# Altium PCB 车架.pcbdoc
Units mil, origin at the board's own origin, x right, y up, seen from the top; angles counter-clockwise.
Board outline 4935 x 4920 mil, 2 copper layers (Top Layer, Bottom Layer); 2 components, 2 nets, 21 pads, 0 vias.
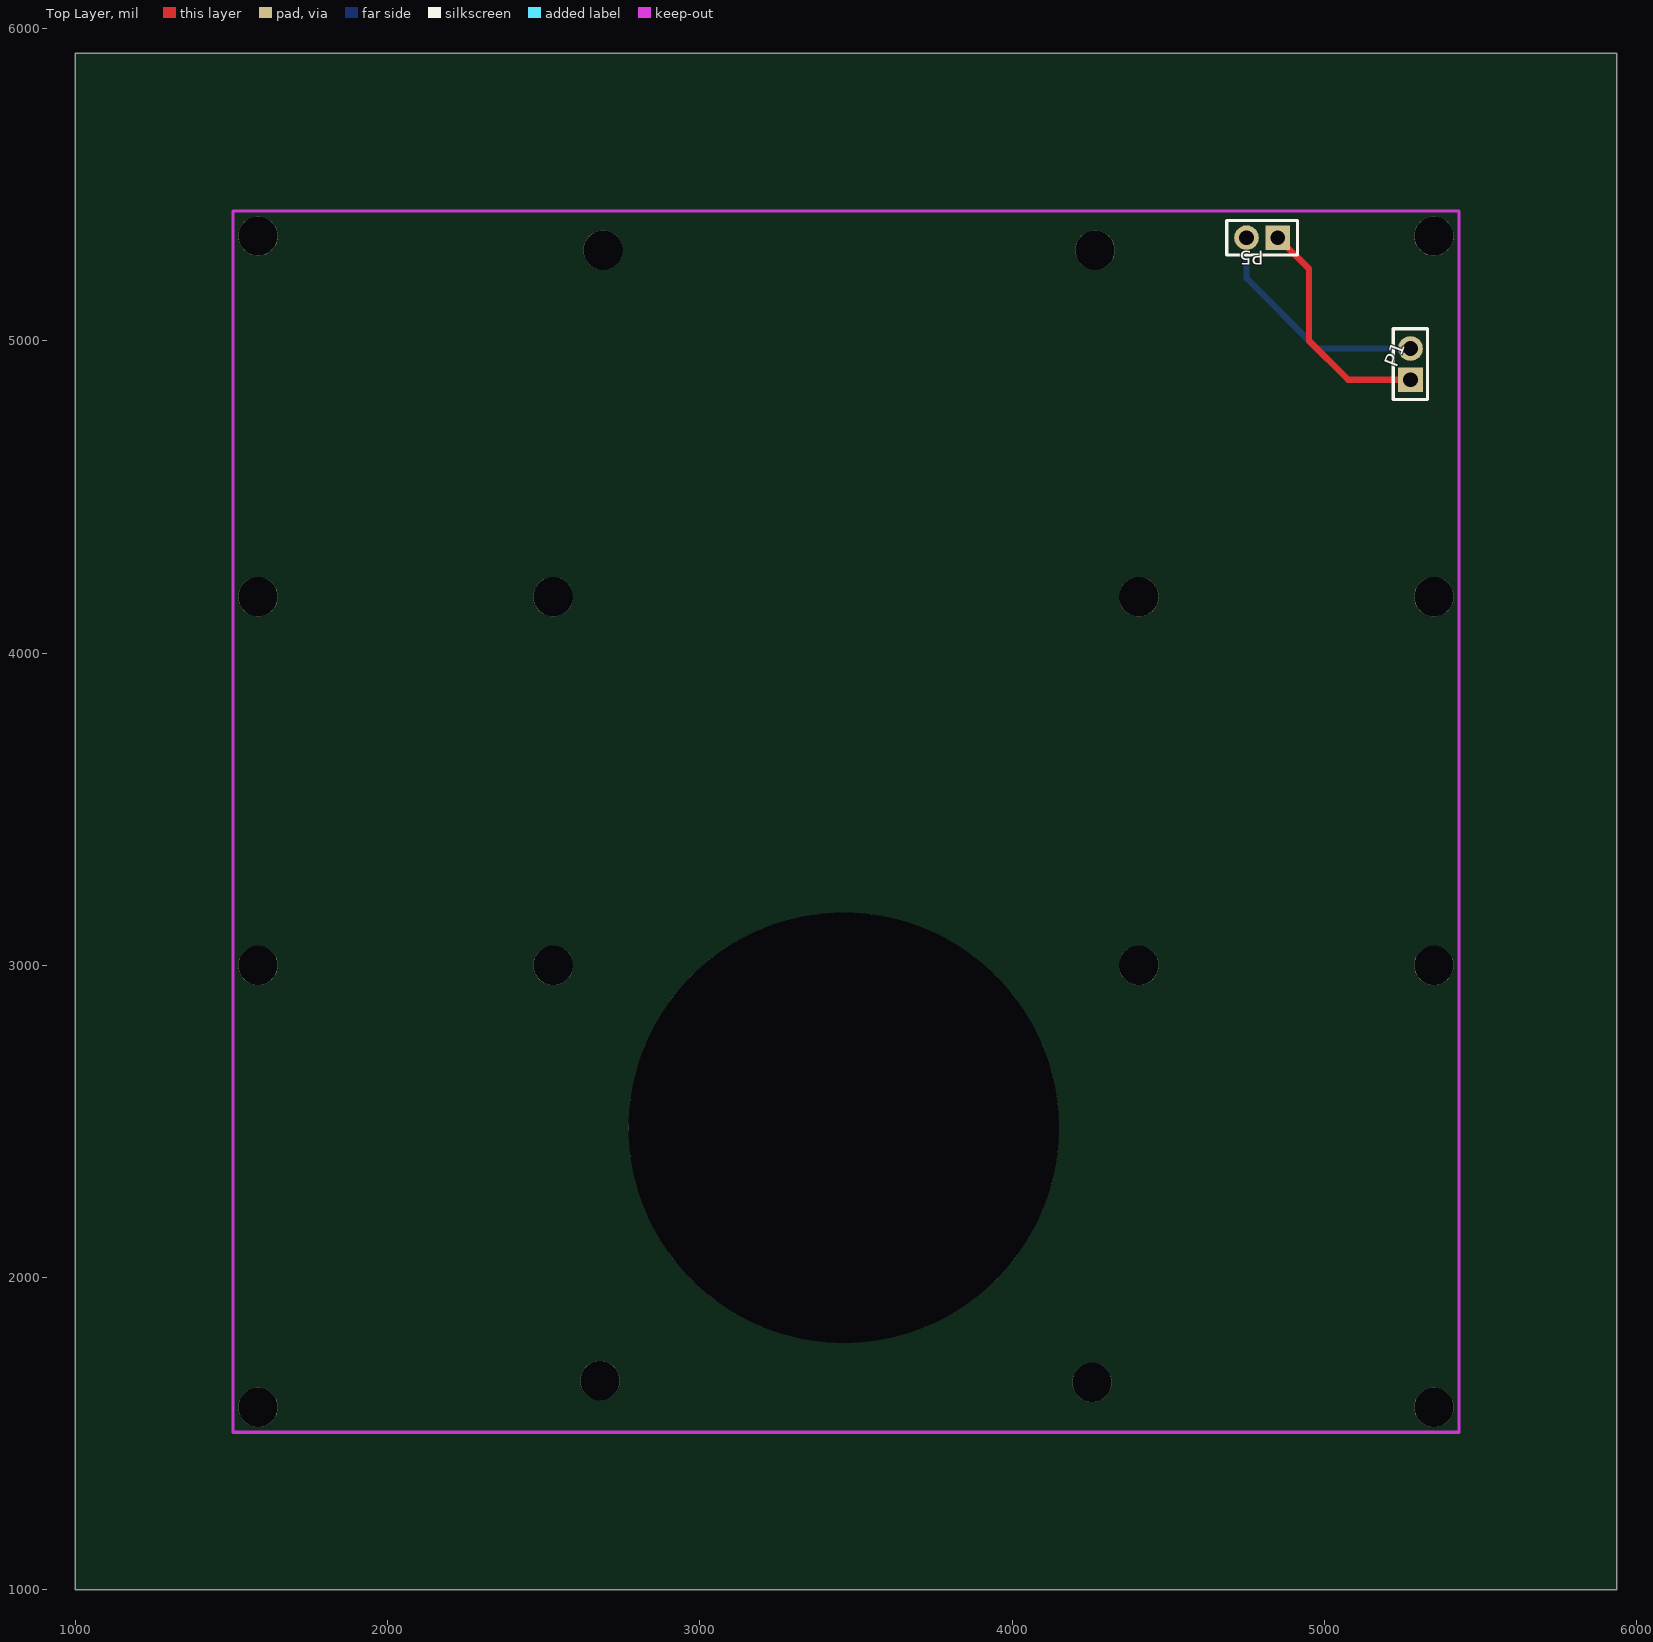
[diagram p0: Top Layer view]
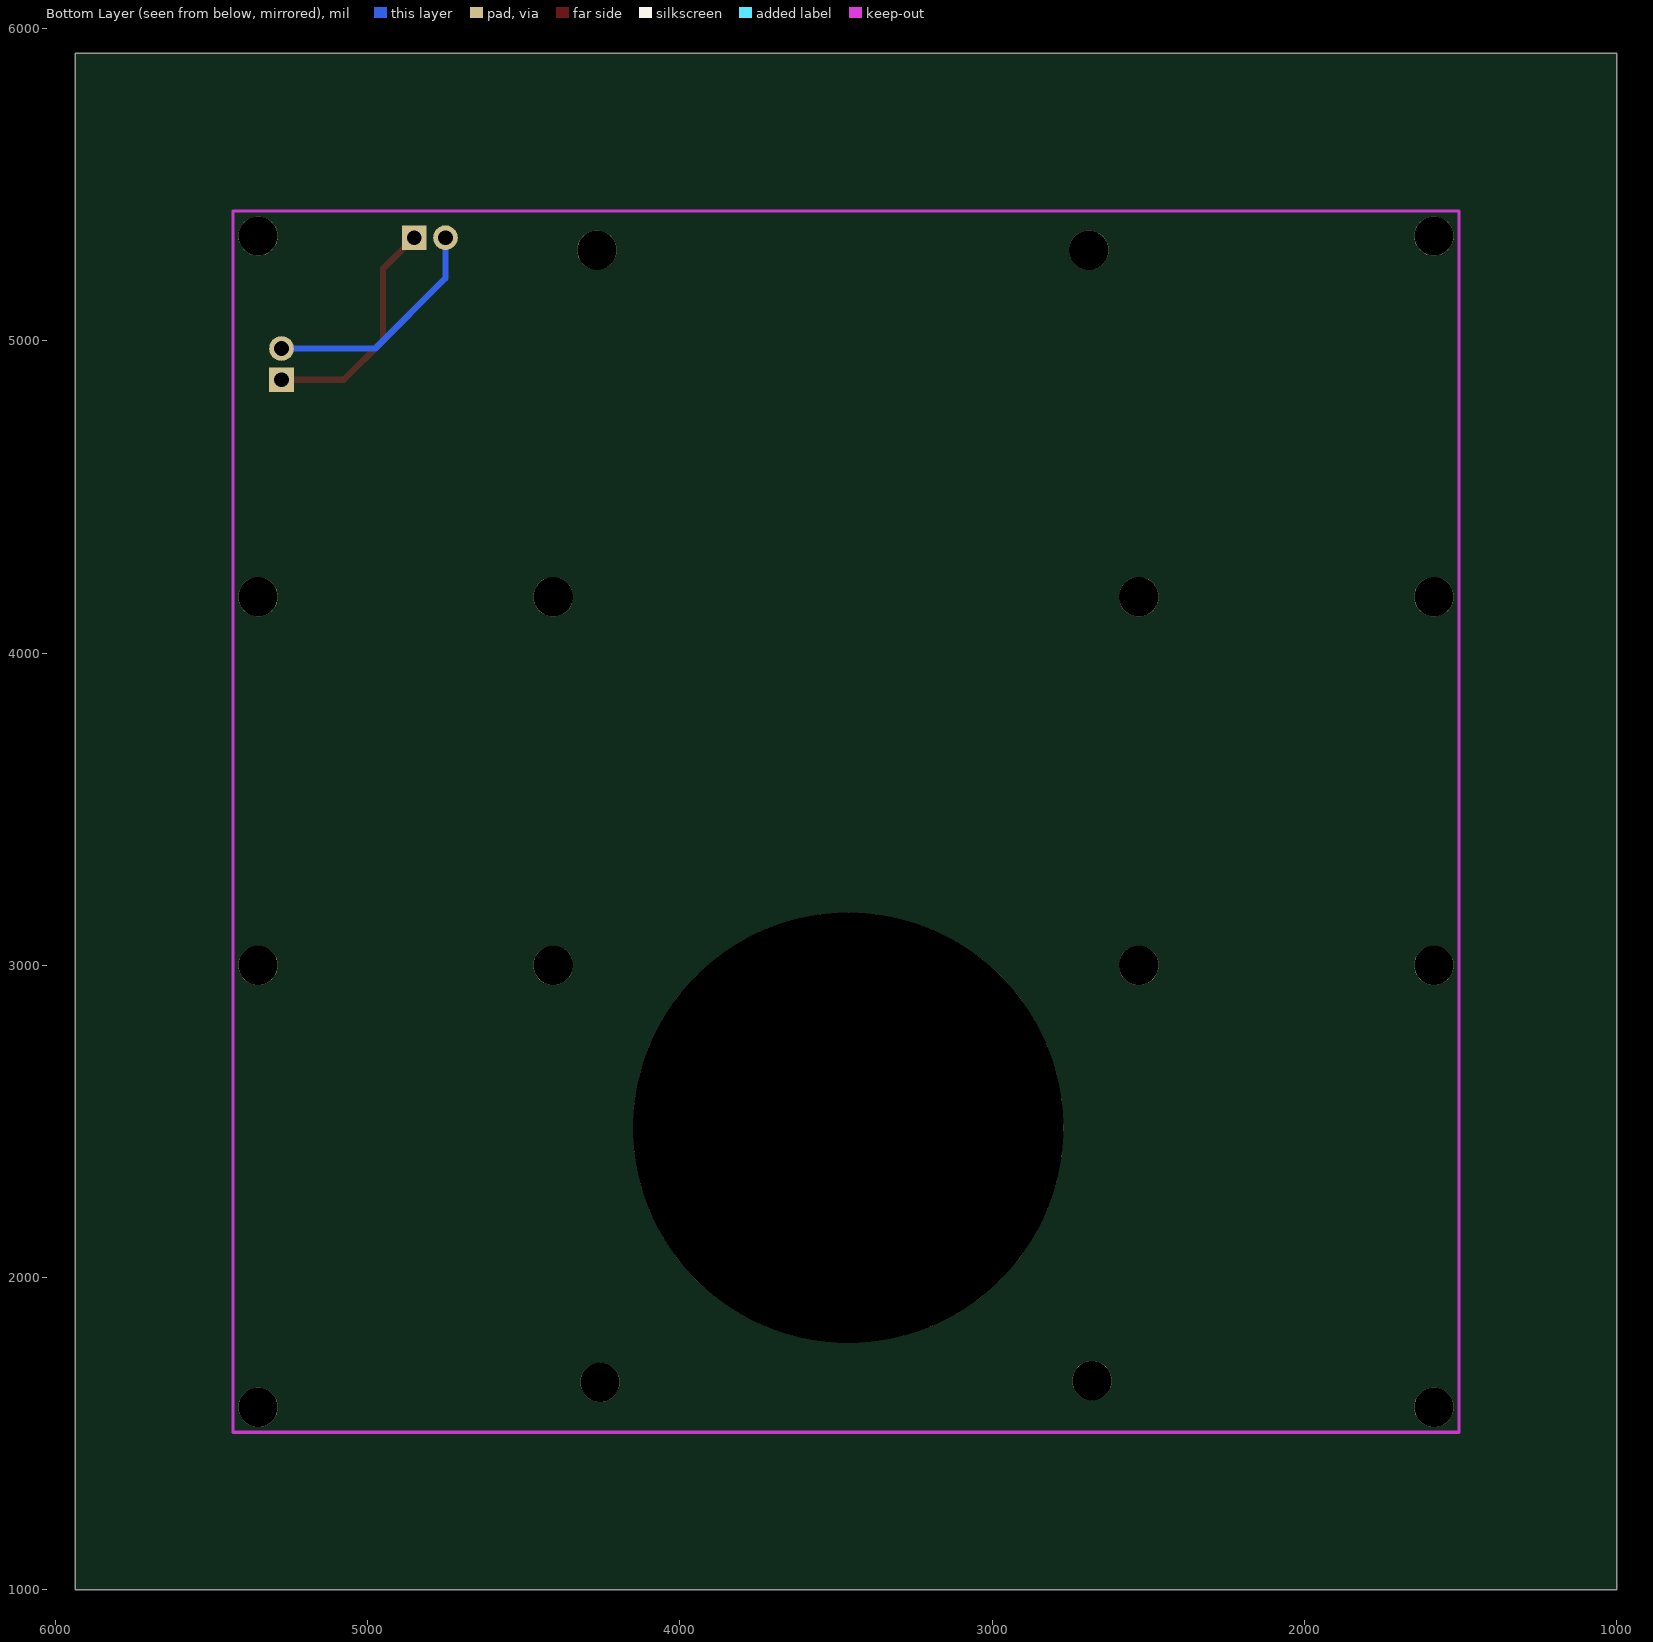
[diagram p1: Bottom Layer view, seen from below]

## Layer stack, top to bottom
Top Layer: signal copper (thickness not stored)
Dielectric: dielectric 12.6, FR-4, Dk 4.8
Bottom Layer: signal copper (thickness not stored)

## Board outline
5935,1000 1000,1000 1000,5920 5935,5920

## Components (designator, comment, footprint, x,y, rotation, side; value= is the part's Value field where it differs from the comment)
P1 "Header-Female-2.54_1x2" HDR-TH_2P-P2.54-V-F 5275,4925 r90 top
P5 "Header-Female-2.54_1x2" HDR-TH_2P-P2.54-V-F 4800,5330 r180 top

## Footprints (in the part's own frame and the unit in brackets; to place one, negate y for a bottom-side part, rotate by r counter-clockwise, add the part's x,y. Pads: shape width x height; smd on the part's side, far side on the other; paste and mask are expansions set on the pad)
HDR-TH_2P-P2.54-V-F [mm]
  rect 2x2 hole 1.2 paste+0 mask+0.051: 1(-1.27,0)
  round 2 hole 1.2 paste+0 mask+0.051: 2(1.27,0)
  silkscreen extent -2.88,-1.39 2.88,1.4

## Free pads (board coordinates)
  round 125.98 hole 125.98 unplated paste+0: ""(1585,1585) ""(1585,3000) ""(1585,4180) ""(1585,5335) ""(2530,3000) ""(2530,4180) ""(2680,1670) ""(2690,5290) ""(4255,1665) ""(4265,5290) ""(4405,3000) ""(4405,4180) ""(5350,1585) ""(5350,3000) ""(5350,4180) ""(5350,5335)
  round 1377.95 hole 1377.95 unplated paste+0: ""(3460,2480)

## Nets (pads, with @x,y where several pads share a name; then routed paths per layer and width w, separated by ;. In a path a pad name is that pad's centre, name@x,y a point inside that pad or via, vN(x,y) a via of type N, cw(c..) or ccw(c..) an arc to the next point about the centre after c; other vN are vias at no path point)
GND: P1.2 P5.2 | length 748.2
  Bottom Layer w20: P5.2 4750,5200 4975,4975 P1.2
VCC: P1.1 P5.1 | length 748.2
  Top Layer w20: P5.1 4950,5230 4950,5000 5075,4875 P1.1

## Silkscreen, mask and mechanical layers (free items; w line width, h text height)
Document:
  lines w0.1: 3467.49,3459.99 3467.51,3460.01